# Altium PCB UWBNode_Pcb.PcbDoc
Units mm, origin at the board's own origin, x right, y up, seen from the top; angles counter-clockwise.
Board outline 30 x 46 mm, 2 copper layers (Top Layer, Bottom Layer), stack 1.66 mm thick; 45 components, 54 nets, 245 pads, 160 vias.
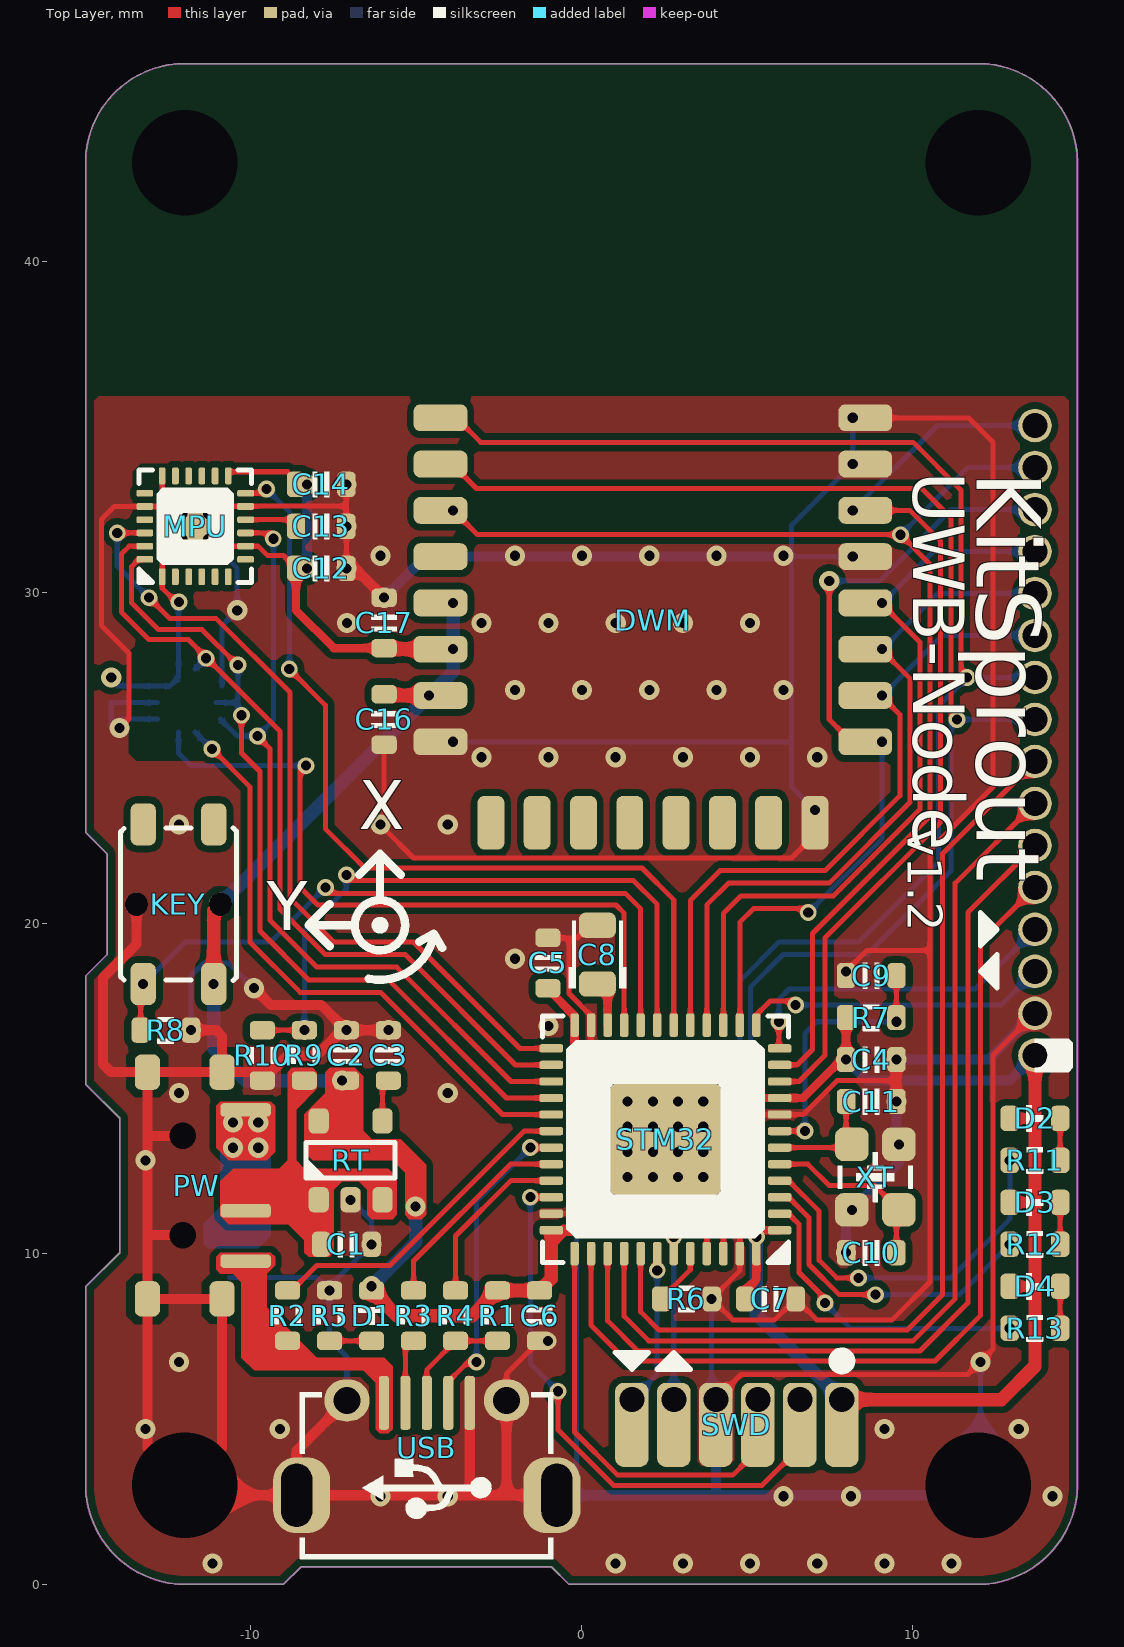
[diagram p0: Top Layer view]
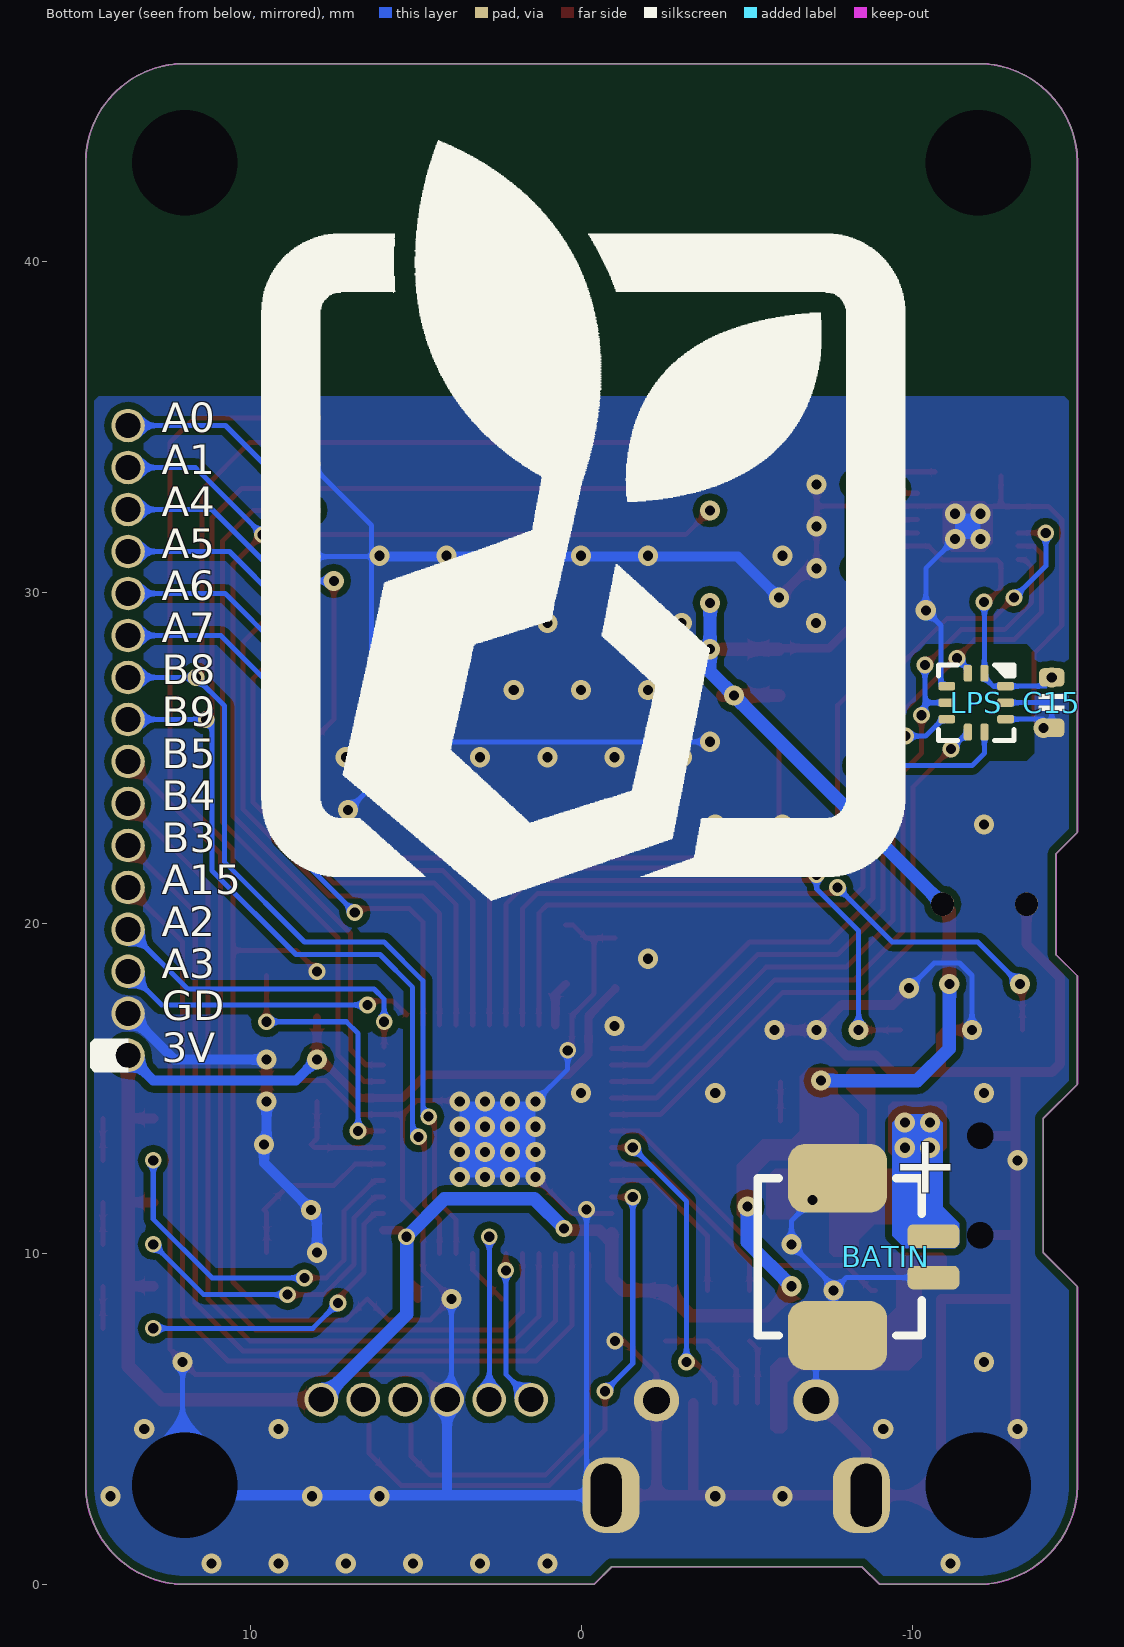
[diagram p1: Bottom Layer view, seen from below]
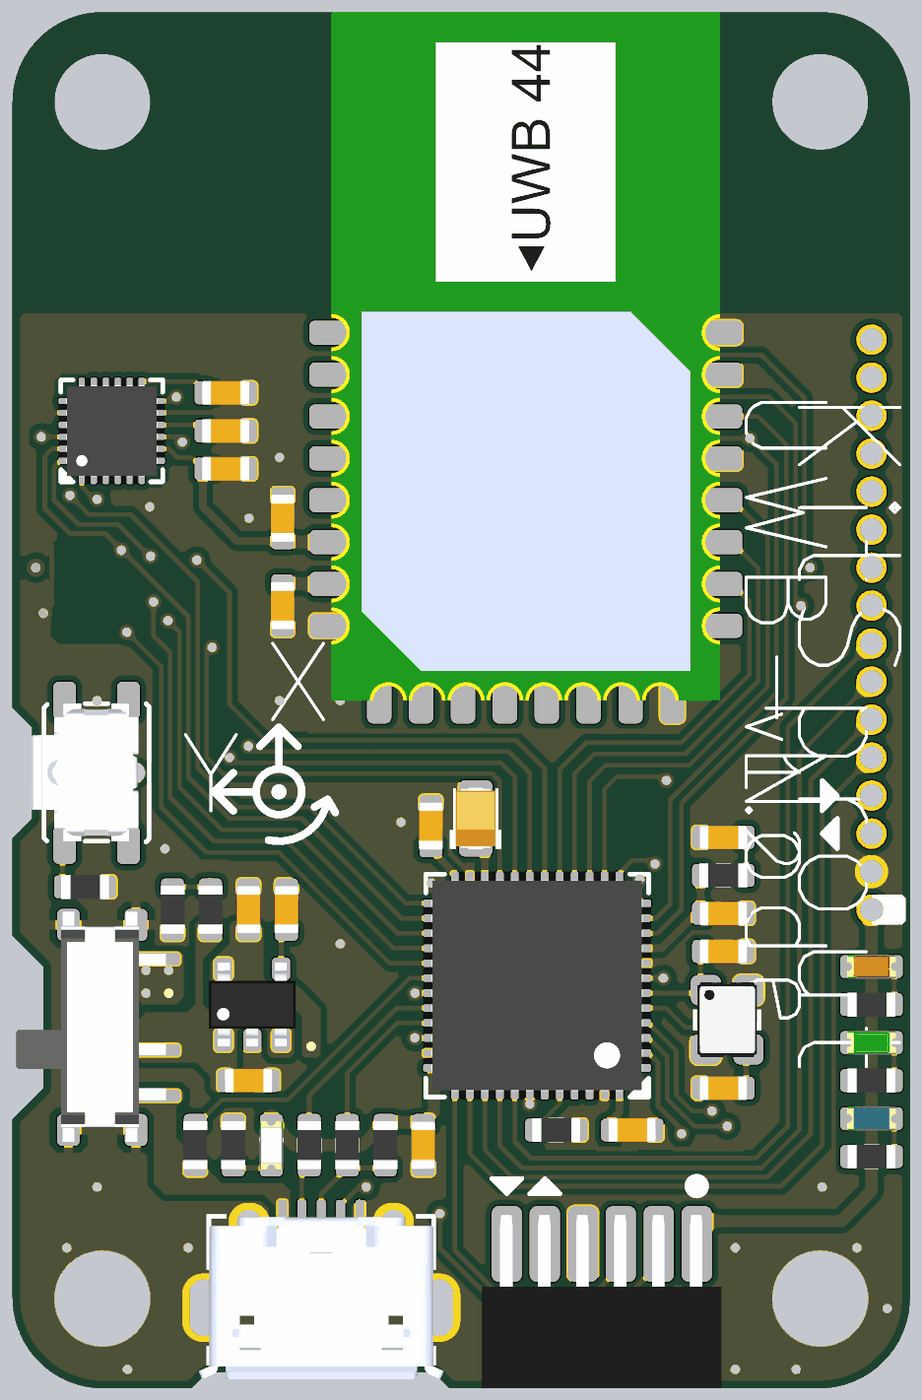
[diagram p2: 3D render of the assembled board from above, using the file's embedded part models]
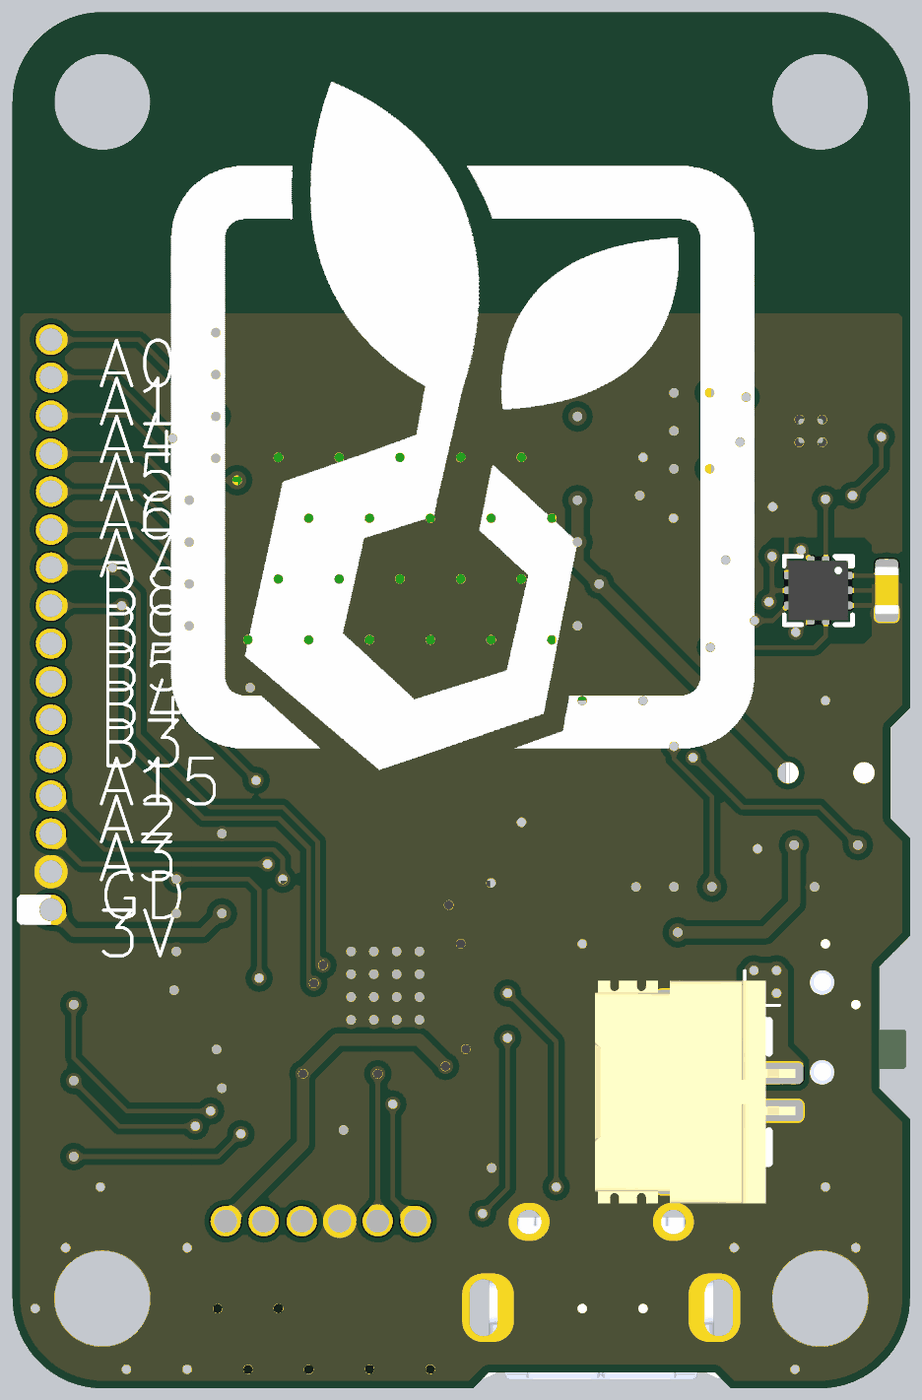
[diagram p3: 3D render of the assembled board from below, using the file's embedded part models]

## Layer stack, top to bottom
Top Solder: solder mask 0.01, Solder Resist, Dk 3.5
Top Layer: signal copper 0.03
Dielectric 1: dielectric 1.6, FR-4, Dk 4.8
Bottom Layer: signal copper 0.03
Bottom Solder: solder mask 0.01, Solder Resist, Dk 3.5

## Board outline
-15,3.033 -15,9.003 -13.97,10.033 -13.97,14.097 -15,15.127 -15,18.401 -14.351,19.05 -14.351,22.098 -15,22.747 -15,43 cw(c-12,43) -12,46 12,46 cw(c12,43) 15,43 15,3.033 cw(c11.967,3.033) 11.967,0 -0.381,0 -0.917,0.536 -8.481,0.536 -9.017,0 -11.967,0 cw(c-11.967,3.033)

## Design rules (kind name [scope] priority, off if disabled: settings)
BoardOutlineClearance [All] p1: gap=0.254 except(0: Arc-SplitContinuation Track-SplitContinuation SMDPad-SplitContinuation THPad-SplitContinuation Via-SplitContinuation Fill-SplitContinuation Poly-SplitContinuation Region-SplitContinuation Text-SplitContinuation)
Clearance ClearancePolygon [InPolygon] p1: gap=0.203
Clearance [All] p2: gap=0.152
ComponentClearance [All] p1: gap=0 collisioncheckmode=3 verticalgap=0 showdistances=FALSE
Height [All] p1: minheight=0 maxheight=127 prefheight=12.7
HoleSize [All] p1: absolutevalues=TRUE maxlimit=5.08 minlimit=0.025 maxpercent=80.000 minpercent=20.000
HoleToHoleClearance [All] p1: gap=0.152 allowstackedmicrovias=TRUE
MinimumAnnularRing [All] p1: minimumring=0.102
MinimumSolderMaskSliver [All] p1: minsoldermaskwidth=0
PolygonConnect [All] p1: connectstyle=Direct reliefconductorwidth=0.254 reliefentries=4 polygonreliefangle="90 Angle" airgapwidth=0.254
RoutingVias [All] p1: holewidth=0.305 width=0.61 viastyle="Through Hole" minholewidth=0.305 minwidth=0.508 maxholewidth=0.711 maxwidth=1.27
SilkToSilkClearance [All] p1: silktosilkclearance=0
SilkToSolderMaskClearance [IsPad] p1: minsilkscreentomaskgap=0 clearancetoexposedcopper=TRUE
SolderMaskExpansion [All] p1: expansion=0.051
Width [All] p1: maxlimit=2.54 minlimit=0.152 preferedwidth=0.254
23 further rules are at their usual default settings.

## Components (designator, comment, footprint, x,y, rotation, side; value= is the part's Value field where it differs from the comment)
BATIN "MX1.25_2P" MX1.25_S90_2P -7.747,9.906 r270 bottom
C1 "Cap_0603" CAP_0603 -7.112,10.287 r180 top
C2 "Cap_0603" CAP_0603 -7.112,16.002 r270 top
C3 "Cap_0603" CAP_0603 -5.842,16.002 r270 top
C4 "Cap_0603" CAP_0603 8.763,15.875 r0 top
C5 "Cap_0603" CAP_0603 -1.016,18.796 r90 top
C6 "Cap_0603" CAP_0603 -1.27,8.128 r270 top
C7 "Cap_0603" CAP_0603 5.715,8.636 r0 top
C8 "Cap_Tan_0805" CAP_TAN_P0805 0.483,19.05 r90 top
C9 "Cap_0603" CAP_0603 8.763,18.415 r0 top
C10 "Cap_0603" CAP_0603 8.763,10.033 r0 top
C11 "Cap_0603" CAP_0603 8.763,14.605 r180 top
C12 "Cap_0603" CAP_0603 -7.874,30.734 r180 top
C13 "Cap_0603" CAP_0603 -7.874,32.004 r180 top
C14 "Cap_0603" CAP_0603 -7.874,33.274 r180 top
C15 "Cap_0603" CAP_0603 -14.224,26.67 r270 bottom
C16 "Cap_0603" CAP_0603 -5.969,26.162 r270 top
C17 "Cap_0603" CAP_0603 -5.969,29.083 r90 top
D1 "LED_0603" LED_0603_YELLOW -6.35,8.128 r270 top
D2 "LED_0603" LED_0603_RED 13.716,14.097 r0 top
D3 "LED_0603" LED_0603_GREEN 13.716,11.557 r0 top
D4 "LED_0603" LED_0603_BLUE 13.716,9.017 r0 top
DWM "DWM1000" DWM1000 2.159,22.987 r0 top locked
KEY "ButtonTACT" ButtonTACT_3.5*3.55_90 -12.192,20.574 r90 top locked
LPS "LPS22HB" HCLGA-2x2_10 -11.938,26.67 r270 bottom
MPU "MPU925x" QFN_P0.4_24 -11.684,32.004 r90 top
PW "SwitchSPDT_2.8x6.6_90" SwitchSPDT_2.8X6.6_90 -12.065,12.065 r270 top locked
R1 "Res_0603" RES_0603 -2.54,8.128 r270 top
R2 "Res_0603" RES_0603 -8.89,8.128 r270 top
R3 "Res_0603" RES_0603 -5.08,8.128 r270 top
R4 "Res_0603" RES_0603 -3.81,8.128 r270 top
R5 "Res_0603" RES_0603 -7.62,8.128 r270 top
R6 "Res_0603" RES_0603 3.175,8.636 r180 top
R7 "Res_0603" RES_0603 8.763,17.145 r180 top
R8 "Res_0603" RES_0603 -12.573,16.764 r180 top
R9 "Res_0603" RES_0603 -8.382,16.002 r90 top
R10 "Res_0603" RES_0603 -9.652,16.002 r270 top
R11 "Res_0603" RES_0603 13.716,12.827 r180 top
R12 "Res_0603" RES_0603 13.716,10.287 r180 top
R13 "Res_0603" RES_0603 13.716,7.747 r180 top
RT "RT9193" SOT23-5 -6.985,12.827 r90 top
STM32 "STM32F4x1C" QFN_P0.5_48 2.54,13.462 r180 top locked
SWD "HDR1x6_1.27" HDR1X6_1.27_180HFD 7.874,4.826 r270 top locked
USB "USB_Micro" USB_Micro-AB -4.68,2.95 r180 top locked
XT "XTAL_2520_4P" XT_2520_4 8.89,12.319 r270 top

## Footprints (in the part's own frame and the unit in brackets; to place one, negate y for a bottom-side part, rotate by r counter-clockwise, add the part's x,y. Pads: shape width x height; smd on the part's side, far side on the other; paste and mask are expansions set on the pad)
ButtonTACT_3.5*3.55_90 [mil]
  round 27.56 hole 27.56 mask+0: 0(-0.01,-50) 0(0,50)
  rrect50% 50x30 smd: 1(-95,42) 2(-95,-42) 3(95,42) 4(95,-42)
  silkscreen extent -91,-69 91,69, body extent -90,-55 91,85, height 56
CAP_0603 [mil]
  rrect50% 22x30 smd: 1(-30,0) 2(30,0)
  silkscreen extent -10,-15 10,15, body extent -31,-16 31,16, height 31
CAP_TAN_P0805 [mil]
  rrect50% 30x44 smd: 1(-35,0) 2(35,0)
  silkscreen extent -40,-34 40,34, body extent -40,-27 40,27, height 59
DWM1000 [mil]
  rrect50% 64x32 smd: 1(-253,484.25) 2(-253,429.13) 3(-253,374.02) 4(-253,318.9) 5(-253,263.78) 6(-253,208.66) 7(-253,153.54) 8(-253,98.43) 17(253,98.43) 18(253,153.54) 19(253,208.66) 20(253,263.78) 21(253,318.9) 22(253,374.02) 23(253,429.13) 24(253,484.25)
  rrect50% 32x64 smd: 9(-192.91,2) 10(-137.8,2) 11(-82.68,2) 12(-27.56,2) 13(27.56,2) 14(82.68,2) 15(137.8,2) 16(192.91,2)
  body extent -256,0 256,906, height 114
HCLGA-2x2_10 [mil]
  rrect50% 20x10 smd: 1(-35,9.84) 2(-35,-9.84) 6(35,-9.84) 7(35,9.84)
  rrect50% 10x20 smd: 3(-19.68,-35) 4(0,-35) 5(19.69,-35) 8(19.69,35) 9(0,35) 10(-19.68,35)
  silkscreen extent -45,-45 45,45, body extent -39,-39 39,39, height 31
HDR1X6_1.27_180HFD [mil]
  rrect50% 100x40 smd: 1(0,0) 2(0,-50) 3(0,-100) 4(0,-150) 5(0,-200) 6(0,-250)
  body extent -38,-283 190,33, height 71
LED_0603_BLUE [mil]
  rrect50% 22x30 smd: 1(-30,0) 2(30,0)
  silkscreen extent -10,-16 10,16, body extent -32,-16 32,16, height 24
LED_0603_GREEN [mil]
  rrect50% 22x30 smd: 1(-30,0) 2(30,0)
  silkscreen extent -10,-16 10,16, body extent -32,-16 32,16, height 24
LED_0603_RED [mil]
  rrect50% 22x30 smd: 1(-30,0) 2(30,0)
  silkscreen extent -10,-16 10,16, body extent -32,-16 32,16, height 24
LED_0603_YELLOW [mil]
  rrect50% 22x30 smd: 1(-30,0) 2(30,0)
  silkscreen extent -10,-16 10,16, body extent -32,-16 32,16, height 24
MX1.25_S90_2P [mil]
  rrect50% 82x118 smd: 0(-93.58,0) 0(93.58,0)
  rrect50% 28x62 smd: 1(-24.61,114) 2(24.61,114)
  silkscreen extent -94,-95 94,100, body extent -147,-129 147,135, height 98
QFN_P0.4_24 [mil]
  rrect50% 20x8 smd: 1(-60,39.37) 2(-60,23.62) 3(-60,7.87) 4(-60,-7.87) 5(-60,-23.62) 6(-60,-39.37) 13(60,-39.37) 14(60,-23.62) 15(60,-7.87) 16(60,7.87) 17(60,23.62) 18(60,39.37)
  rrect50% 8x20 smd: 7(-39.37,-60) 8(-23.62,-60) 9(-7.87,-60) 10(7.87,-60) 11(23.62,-60) 12(39.37,-60) 19(39.37,60) 20(23.62,60) 21(7.87,60) 22(-7.87,60) 23(-23.62,60) 24(-39.37,60)
  rrect20% 32x32 smd: 25(0,0)
  silkscreen extent -67,-67 67,67, body extent -60,-60 60,60, height 39
QFN_P0.5_48 [mil]
  rrect50% 28x10 smd: 1(-136,108.27) 2(-136,88.58) 3(-136,68.9) 4(-136,49.21) 5(-136,29.53) 6(-136,9.84) 7(-136,-9.84) 8(-136,-29.53) 9(-136,-49.21) 10(-136,-68.9) 11(-136,-88.58) 12(-136,-108.27) 25(136,-108.27) 26(136,-88.58) 27(136,-68.9) 28(136,-49.21) 29(136,-29.53) 30(136,-9.84) 31(136,9.84) 32(136,29.53) 33(136,49.21) 34(136,68.9) 35(136,88.58) 36(136,108.27)
  rrect50% 10x28 smd: 13(-108.27,-136) 14(-88.58,-136) 15(-68.9,-136) 16(-49.21,-136) 17(-29.53,-136) 18(-9.84,-136) 19(9.84,-136) 20(29.53,-136) 21(49.21,-136) 22(68.9,-136) 23(88.58,-136) 24(108.27,-136) 37(108.27,136) 38(88.58,136) 39(68.9,136) 40(49.21,136) 41(29.53,136) 42(9.84,136) 43(-9.84,136) 44(-29.53,136) 45(-49.21,136) 46(-68.9,136) 47(-88.58,136) 48(-108.27,136)
  rrect10% 132x132 smd: 49(0,0)
  silkscreen extent -147,-147 147,147, body extent -139,-139 139,139, height 22
RES_0603 [mil]
  rrect50% 22x30 smd: 1(-30,0) 2(30,0)
  silkscreen extent -10,-16 10,16, body extent -31,-16 31,16, height 18
SOT23-5 [mil]
  rrect50% 30x24 smd: 1(-47,38) 2(-47,0) 3(-47,-38) 4(47,-38) 5(47,38)
  silkscreen extent -21,-53 21,53, body extent -55,-57 55,57, height 57
SwitchSPDT_2.8X6.6_90 [mil]
  rrect50% 42x30 smd: 0(-135,-42) 0(-135,47) 0(135,-42) 0(135,47)
  round 10 hole 31.5: 0(-59.06,0) 0(59.06,0)
  rrect50% 16x60 smd: 1(90,75) 2(30,75) 3(-90,75)
  body extent -152,-111 151,86, height 55
USB_Micro-AB [mil]
  rrect80% 68x90 hole 37 slot 75 at 90 deg copper offset 6,0 mask+0: 0(-155,10)
  oval 54x50 hole 32 mask+0: 0(-95,-103) 0(95,-103)
  rrect80% 68x90 hole 37 slot 75 at 90 deg copper offset -6,0 mask+0: 0(155,10)
  rrect50% 12x64 smd: 1(51.18,-100) 2(25.59,-100) 3(0,-100) 4(-25.59,-100) 5(-51.18,-100)
  silkscreen extent -150,-113 150,86, body extent -161,-109 161,104, height 108
XT_2520_4 [mil]
  rrect50% 40x40 smd: 1(39,28) 2(-39,28) 3(-39,-28) 4(39,-28)
  silkscreen extent -30,-44 30,44, body extent -49,-39 49,39, height 31

## Part data
BATIN: "MX"
C1 C2 C3 C4 C5 C6 C7 C8 C9 C10 C11 C12 C13 C14 C15 C16 C17: "Capacitor"
D1 D2 D3 D4: "LED"
DWM: "Module"
KEY: "Button"
LPS: "Sensor Pressure"
MPU: "Sensor Motion"
PW: "Switch"
R1 R2 R3 R4 R5 R6 R7 R8 R9 R10 R11 R12 R13: "Resistor"
RT: "Power"
STM32: "MCU"
SWD: "Header"
USB: "USB"
XT: "Crystal Oscillator"

## Free pads (board coordinates)
  round 2.9 hole 3.2 unplated paste+0 mask+0: 0(-12,43) 0(12,43)
  round 2.9 hole 3.2 paste+0 mask+0: 0(-12,3) 0(12,3)
  round 1.016 hole 0.762: 0(13.716,16.002) 0(13.716,17.272) 0(13.716,18.542) 0(13.716,19.812) 0(13.716,21.082) 0(13.716,22.352) 0(13.716,23.622) 0(13.716,24.892) 0(13.716,26.162) 0(13.716,27.432) 0(13.716,28.702) 0(13.716,29.972) 0(13.716,31.242) 0(13.716,32.512) 0(13.716,33.782) 0(13.716,35.052) 2(1.524,5.588) 2(2.794,5.588) 2(4.064,5.588) 2(5.334,5.588) 2(6.604,5.588) 2(7.874,5.588)

## Via types
v1: diameter 0.61, hole 0.305, Top Layer to Bottom Layer, tented both sides, 118 vias
v2: diameter 0.508, hole 0.305, Top Layer to Bottom Layer, tented both sides, 42 vias

## Nets (pads, with @x,y where several pads share a name; then routed paths per layer and width w, separated by ;. In a path a pad name is that pad's centre, name@x,y a point inside that pad or via, vN(x,y) a via of type N, cw(c..) or ccw(c..) an arc to the next point about the centre after c; other vN are vias at no path point)
3V3: C2.2 C4.1 C5.1 C6.1 C7.1 C12.2 C14.2 C15.1 C16.1 C17.1 D1.1 D2.1 D3.1 D4.1 DWM.5 DWM.6 DWM.7 KEY.0@-10.922,20.574 KEY.2 LPS.1 LPS.10 MPU.1 MPU.8 MPU.13 pad.0@13.716,16.002 pad.2@7.874,5.588 R1.1 R7.2 RT.5 STM32.1 STM32.9 STM32.24 STM32.36 STM32.48 SWD.1 | length 107.5
  Top Layer w0.152: v2(-12.176,29.718) -12.272,29.718 -12.684,30.13 MPU.1 -12.684,30.877 -12.573,30.988 -10.922,30.988 -10.506,31.404 MPU.8 -9.781,31.404 -9.492,31.115 -9.017,31.115 C12.2 ; MPU.13@-10.684,33.655 -8.89,33.655 C14.2@-8.572,33.337
  Top Layer w0.254: C12.2 -8.636,29.464 -7.493,28.321 C17.1 ; C5.1 -1.016,18.005 -0.21,17.199 STM32.24 -0.21,16.027 0.399,15.418 4.707,15.418 5.413,14.712 STM32.9 6.703,14.712 6.85,14.859 7.866,15.875 v1(8.001,15.875) R7.2 ; C7.1 4.953,8.89 5.29,9.227 STM32.48 ; v2(5.29,10.516) 5.486,10.712 STM32.1
  Top Layer w0.305: D4.1 13.716,9.017 ; D3.1 13.716,11.557 ; D2.1 13.716,14.097
  Top Layer w0.356: -0.914,10.338 -0.54,10.712 v2@0.425,10.712
  Top Layer w0.406: v1(-11.125,18.161) -11.125,20.371 KEY.0@-10.922,20.574 ; D1.1 -5.588,8.128 -3.302,8.128 R1.1 C6.1 -0.914,9.246 -0.914,10.338 STM32.36@-0.914,10.61 ; C16.1@-5.969,26.887 v1(-4.609,26.887) DWM.7 ; C17.1@-5.963,28.287 DWM.6 ; SWD.1@7.62,5.842 SWD.1@7.696,5.842 ; SWD.1@7.745,5.565 SWD.1@7.696,5.842 ; pad.0@13.716,16.002 13.716,14.097 13.716,11.557 13.716,9.017 13.716,6.604 12.7,5.588 7.95,5.588 SWD.1@7.696,5.842
  Bottom Layer w0.152: v1(-14.224,27.432) -13.962,27.17 LPS.10 -12.454,27.17 -12.188,27.436 LPS.1 v2@-12.188,29.706
  Bottom Layer w0.305: v1(-8.306,30.734) v1(-8.306,33.274) ; v1(8.001,15.875) 8.636,15.24 12.954,15.24 pad.0@13.716,16.002
  Bottom Layer w0.406: v1(-11.125,18.161) -11.125,16.205 -10.16,15.24 v1(-7.239,15.24) ; KEY.0@-10.922,20.574 v1(-4.609,26.887) -3.886,27.61 v1(-3.886,28.287) v1(-3.886,29.687) ; v1(-6.35,9.017) -5.017,10.35 v1(-5.017,11.43) ; v2(0.527,10.763) 1.422,11.659 4.147,11.659 v2(5.29,10.516) 5.29,8.172 pad.2@7.874,5.588
ADC: R9.2 R10.1 STM32.19 | length 19.8
  Top Layer w0.152: R10.1 v1(-8.382,16.764) ; v2@-7.112,21.285 1.575,21.285 2.29,20.57 STM32.19
  Bottom Layer w0.152: v1(-8.382,16.764) -8.382,19.765 -7.112,21.035 v2(-7.112,21.463)
BOOT: R6.2 STM32.44 | length 1.7
  Top Layer w0.152: R6.2 3.29,9.513 STM32.44
D_CSD: DWM.17 pad.0@13.716,32.512 STM32.14 | length 24.1
  Top Layer w0.152: STM32.14 4.79,20.03 5.207,20.447 v2@6.858,20.447 ; v1(7.493,30.353) 7.493,26.162 8.168,25.487 DWM.17
  Bottom Layer w0.152: v2(6.858,20.32) 9.093,22.555 v1(9.093,25.487) ; v1(7.493,30.353) 9.017,30.353 11.176,32.512 pad.0@13.716,32.512
D_EXT: DWM.1 pad.0@13.716,27.432 STM32.45 | length 46.3
  Top Layer w0.152: DWM.1 -3.791,35.287 -3.048,34.544 10.033,34.544 11.481,33.096 v2@11.481,27.432 ; STM32.45 3.79,11.029 4.445,11.684 v2@4.445,14.148
  Bottom Layer w0.152: v2@4.801,14.148 4.801,18.263 5.969,19.431 8.382,19.431 10.795,21.844 10.795,26.568 v2(11.659,27.432) pad.0@13.716,27.432
  other v2: 4.623,14.148
D_IRQ: DWM.22 pad.0@13.716,35.052 STM32.10 | length 28.3
  Top Layer w0.152: STM32.10 6.576,15.212 7.366,16.002 7.366,19.558 10.864,23.056 10.864,31.554 9.931,32.487 DWM.22 v1(8.204,32.487)
  Bottom Layer w0.152: v1(8.204,32.487) 10.769,35.052 pad.0@13.716,35.052
D_PHA: DWM.9
D_POL: DWM.10
D_RST: DWM.3 pad.0@13.716,33.782 STM32.11 | length 37.3
  Top Layer w0.152: v1(-3.886,32.487) -3.149,31.75 v2(9.652,31.75) 10.541,30.861 10.541,23.241 6.985,19.685 6.985,16.179 6.518,15.712 STM32.11
  Bottom Layer w0.152: v2(9.652,31.75) 11.684,33.782 pad.0@13.716,33.782
D_SCK: DWM.20 pad.0@13.716,31.242 STM32.15 | length 23.5
  Top Layer w0.152: STM32.15 4.29,20.292 4.826,20.828 7.62,20.828 10.236,23.444 10.236,28.499 9.048,29.687 DWM.20 DWM.20@8.204,29.687
  Bottom Layer w0.152: v1(9.093,29.687) 10.648,31.242 pad.0@13.716,31.242
D_SDI: DWM.18 pad.0@13.716,28.702 STM32.17 | length 20.9
  Top Layer w0.152: STM32.17 3.29,20.689 4.191,21.59 7.366,21.59 9.627,23.851 9.627,26.314 9.054,26.887 DWM.18 DWM.18@8.204,26.887
  Bottom Layer w0.152: v1(9.093,26.887) 10.908,28.702 pad.0@13.716,28.702
D_SDO: DWM.19 pad.0@13.716,29.972 STM32.16 | length 22.2
  Top Layer w0.152: STM32.16 3.79,20.554 4.445,21.209 7.493,21.209 9.931,23.647 9.931,27.407 9.051,28.287 DWM.19 DWM.19@8.204,28.287
  Bottom Layer w0.152: v1(9.093,28.287) 10.778,29.972 pad.0@13.716,29.972
D_WAK: DWM.2 pad.0@13.716,26.162 STM32.46 | length 44.9
  Top Layer w0.152: DWM.2 -3.915,33.887 -3.175,33.147 10.287,33.147 11.176,32.258 v2@11.176,26.162 ; STM32.46 4.29,11.021 4.75,11.481 v2@4.75,13.538
  Bottom Layer w0.152: v2@5.105,13.538 5.105,18.059 6.096,19.05 8.636,19.05 11.176,21.59 v2@11.176,26.162 ; v2(11.354,26.162) pad.0@13.716,26.162
  other v2: 4.928,13.538
GND: BATIN.0 BATIN.2 C1.1 C2.1 C3.1 C4.2 C5.2 C6.2 C7.2 C8.2 C9.1 C10.1 C11.1 C12.1 C13.1 C14.1 C15.2 C16.2 C17.2 DWM.8 DWM.16 DWM.21 DWM.23 DWM.24 KEY.0@-13.462,20.574 LPS.3 LPS.8 LPS.9 MPU.11 MPU.18 MPU.20 MPU.25 pad.0@12,3 pad.0@13.716,17.272 pad.0@-12,3 pad.2@4.064,5.588 PW.0 R5.1 R6.1 R8.1 R10.2 RT.2 STM32.8 STM32.23 STM32.35 STM32.47 STM32.49 SWD.4 USB.0 USB.5 XT.2 XT.4 | length 291.4
  Top Layer w0.152: v1(-13.97,25.908) -13.691,26.187 -13.691,28.169 -14.526,29.004 -14.526,32.21 -14.132,32.604 MPU.20 -12.684,32.604 ; MPU.18 -12.684,32.604 ; MPU.25 v1(-12.065,32.385) -12.284,32.604 -12.684,32.604 ; v1(-11.303,32.385) -11.074,32.614 MPU.11@-10.16,32.614 ; MPU.11 MPU.11@-10.16,32.614 ; v1(-7.112,30.734) v1(-7.112,32.004) -7.112,32.614 ; v1(-7.112,33.274) -7.112,32.614 ; C16.2 -5.969,22.86 -5.08,21.971 6.35,21.971 7.059,22.68 DWM.16 ; USB.0@-2.267,5.566 -2.267,6.369 C6.2 ; C5.2 -0.381,19.558 ; STM32.35 0.29,11.212 v1(1.397,12.319) v1(2.159,13.081) STM32.49 ; v2(0.417,16.154) 0.29,16.281 STM32.23 0.29,17.202 -0.381,17.873 -0.381,19.558 ; C8.2 0.254,19.939 -0.127,19.558 -0.381,19.558 ; STM32.49@3.683,14.63 4.992,14.63 5.41,14.212 ; SWD.4 4.064,5.588 4.826,6.35 11.684,6.35 v1(12.065,6.731) 12.446,7.112 12.446,16.002 pad.0@13.716,17.272 ; v2(8.001,18.542) 8.636,19.177 10.541,19.177 ; v1(8.204,35.287) DWM.24 11.703,35.287 12.446,34.544 12.446,24.13 10.541,22.225 10.541,19.177 ; 9.525,15.24 7.734,15.24 6.706,14.212 STM32.8 5.41,14.212 ; MPU.11@-10.16,32.614 -7.112,32.614 ; 5.41,14.212 5.41,11.633 4.79,11.013 STM32.47 4.79,9.489 v1(3.937,8.636) 4.572,8.001 5.842,8.001 C7.2 7.112,8.001 9.398,8.001 10.541,9.144 10.541,19.177
  Top Layer w0.305: KEY.0@-13.462,20.574 -13.462,19.364 -14.478,18.348 -14.478,15.748 -14.224,15.494 PW.0@-13.132,15.494 ; PW.0@-12.065,10.565 -13.132,10.565 ; PW.0@-12.065,13.565 -13.132,13.565 ; v1(-11.811,16.764) -11.049,16.764 -10.871,16.586 PW.0@-10.871,15.494 ; v1(-9.906,18.034) -9.398,17.526 -7.874,17.526 v1(-7.112,16.764) v1(-5.842,16.764) ; C2.1@-7.239,16.764 -8.001,16.002 -8.89,16.002 -9.398,15.494 PW.0@-10.871,15.494 ; v1(-7.112,30.734) -6.858,30.734 v1(-5.969,29.845) ; USB.0@-7.093,5.566 -8.617,4.042 USB.0@-8.617,2.696 ; USB.5 -3.38,2.696 ; USB.0@-2.267,5.566 -2.267,2.696 ; USB.0@-0.743,2.696 -2.267,2.696 ; v1(9.525,14.605) 9.525,15.24 v1(9.525,15.875) ; PW.0@-13.132,8.636 -13.132,10.565 ; PW.0@-13.132,8.636 -10.871,8.636 -10.871,4.129 pad.0@-12,3 ; PW.0@-13.132,8.636 -13.132,4.132 pad.0@-12,3 ; -13.132,10.565 -13.132,13.565 ; -13.132,13.565 PW.0@-13.132,15.494 ; PW.0@-13.132,15.494 PW.0@-10.871,15.494 ; pad.0@-12,3 -11.696,2.696 USB.0@-8.617,2.696 ; USB.0@-8.617,2.696 -3.38,2.696 ; -3.38,2.696 -2.267,2.696
  Bottom Layer w0.152: LPS.8 -13.962,26.17 C15.2 -14.224,26.67 LPS.9 ; v1(-11.811,16.764) -11.811,18.415 -11.43,18.796 -10.668,18.796 v1(-9.906,18.034) ; v1(-11.303,31.623) -10.414,30.734 v1(-10.414,29.464) -10.871,29.007 LPS.3@-10.871,27.17 ; BATIN.2 -8.011,9.281 v1(-7.62,8.89) ; USB.0@-7.093,5.566 -7.093,6.875 -7.747,7.529 -7.62,7.656 v1(-7.62,8.89) ; v1(-6.985,11.633) -6.35,10.998 v1(-6.35,10.287) -7.62,9.017 v1(-7.62,8.89) ; v1(-3.886,25.487) 6.35,25.487 ; USB.0@-0.743,2.696 -0.152,3.287 v2(-0.152,11.339) ; v2(0.417,16.154) 0.417,15.585 v1(1.397,14.605) ; v1(3.937,8.636) 3.937,5.715 pad.2@4.064,5.588 ; v1(7.059,23.419) 6.35,24.128 6.35,25.487 ; v1(8.204,31.087) v1@6.35,31.087 ; v1(8.204,35.287) v1(8.204,33.887) 6.35,32.033 v1@6.35,31.087 ; pad.0@12.065,3 v1(12.065,6.731) ; 6.35,25.487 v1@6.35,31.087
  Bottom Layer w0.305: v1(-5.969,29.845) -4.727,31.087 0.018,31.087 v1@6.35,31.087 ; USB.0@-0.743,2.696 4.064,2.696 ; pad.2@4.064,5.588 4.064,2.696 ; v1(8.001,10.033) 8.001,11.151 v1(8.179,11.328) 9.601,12.751 v1(9.601,13.31) 9.525,13.386 v1(9.525,14.605) ; v1(9.525,15.875) 12.319,15.875 pad.0@13.716,17.272 ; pad.0@11.696,2.696 4.064,2.696
  other v1: -11.158,0.635 1.034,0.635 3.066,0.635 5.098,0.635 7.13,0.635 9.162,0.635 11.194,0.635 -6.078,2.667 -4.046,2.667 6.114,2.667 8.146,2.667 14.242,2.667 -13.19,4.699 -9.126,4.699 9.162,4.699 13.226,4.699 -12.174,6.731 2.159,12.319 2.921,12.319 3.683,12.319 -13.19,12.827 1.397,13.081 2.921,13.081 3.683,13.081 1.397,13.843 2.159,13.843 2.921,13.843 3.683,13.843 2.159,14.605 2.921,14.605 3.683,14.605 -12.174,14.859 -4.046,14.859 0.018,14.859 -0.998,16.891 -2.014,18.923 -12.174,22.987 -6.078,22.987 -4.046,22.987 -3.03,25.019 -0.998,25.019 1.034,25.019 3.066,25.019 5.098,25.019 7.13,25.019 -2.014,27.051 0.018,27.051 2.05,27.051 4.082,27.051 6.114,27.051 -7.094,29.083 -3.03,29.083 -0.998,29.083 1.034,29.083 3.066,29.083 5.098,29.083 -6.078,31.115 -2.014,31.115 0.018,31.115 2.05,31.115 4.082,31.115 6.114,31.115 -12.065,31.623
  other v2: -1.016,7.366
KEY: KEY.1 R8.2 STM32.20 | length 21.4
  Top Layer w0.152: R8.2 KEY.1@-13.335,18.161 ; v2@-7.747,20.904 1.321,20.904 1.79,20.435 STM32.20
  Bottom Layer w0.152: v1(-13.259,18.161) -11.989,19.431 -9.398,19.431 v2(-7.747,21.082)
LED_B: R13.2 STM32.2 | length 9.3
  Top Layer w0.152: STM32.2 6.263,11.212 6.579,10.896 6.579,9.436 7.366,8.649 v2(7.366,8.509)
  Bottom Layer w0.152: v2(7.366,8.509) 8.128,7.747 v2(12.954,7.747)
LED_G: R12.2 STM32.3 | length 9.6
  Top Layer w0.152: STM32.3 6.263,11.712 6.883,11.092 6.883,9.677 7.797,8.763 v2(8.89,8.763)
  Bottom Layer w0.152: v2(8.89,8.763) 11.43,8.763 v2(12.954,10.287)
LED_R: R11.2 STM32.4 | length 11.6
  Top Layer w0.152: STM32.4 6.263,12.212 7.188,11.287 7.188,9.803 7.72,9.271 v2(8.382,9.271)
  Bottom Layer w0.152: v2(8.382,9.271) 11.176,9.271 12.954,11.049 v2(12.954,12.827)
M_CSB: LPS.6 STM32.29 | length 18.3
  Top Layer w0.152: v2(-11.18,25.273) -10.033,24.126 -10.033,19.431 -8.509,17.907 -6.083,17.907 -2.388,14.212 STM32.29
  Bottom Layer w0.152: LPS.6 v2(-11.18,25.273)
M_CSM: MPU.22 STM32.25 | length 24.7
  Top Layer w0.152: v2(-14.043,31.804) MPU.22 ; v2(-13.081,29.845) -12.446,29.21 -11.049,29.21 -8.814,26.975 -8.814,20.752 -7.493,19.431 -5.08,19.431 -1.861,16.212 STM32.25
  Bottom Layer w0.152: v2(-14.043,31.804) -14.043,30.807 v2(-13.081,29.845)
M_INTB: LPS.7 STM32.21 | length 21.8
  Top Layer w0.152: v2@-8.509,24.765 -8.509,21.082 -7.976,20.549 1.041,20.549 1.29,20.3 STM32.21
  Bottom Layer w0.152: LPS.7 -12.188,25.142 -11.811,24.765 v2(-8.331,24.765)
M_INTM: MPU.12 STM32.18 | length 26.9
  Top Layer w0.152: MPU.12 -9.652,33.004 v2(-9.525,33.131) ; v2(-8.839,27.686) -7.747,26.594 -7.747,22.86 -6.553,21.666 1.829,21.666 2.79,20.705 STM32.18
  Bottom Layer w0.152: v2(-9.525,33.131) -8.839,32.445 v2(-8.839,27.686)
M_SCK: LPS.2 MPU.23 STM32.26 | length 24.9
  Top Layer w0.152: MPU.23 -13.681,31.404 -13.919,31.166 -13.919,29.413 -13.081,28.575 -11.891,28.575 -9.119,25.803 -9.119,20.422 -7.747,19.05 -5.334,19.05 -1.996,15.712 STM32.26
  Bottom Layer w0.152: LPS.2@-11.684,27.686 v2(-11.359,28.014)
M_SDI: LPS.4 MPU.24 STM32.28 | length 25.4
  Top Layer w0.152: MPU.24 -13.395,31.004 -13.614,30.785 -13.614,29.696 -12.798,28.88 -11.481,28.88 v2@-10.414,27.813 ; v2(-10.287,26.289) -10.287,25.146 -9.728,24.587 -9.728,19.761 -8.255,18.288 -5.842,18.288 -2.266,14.712 STM32.28
  Bottom Layer w0.152: LPS.4 -10.389,26.67 ; v2@-10.389,26.289 -10.389,26.67 ; v2(-10.389,27.813) -10.389,26.67
M_SDO: LPS.5 MPU.9 STM32.27 | length 24.6
  Top Layer w0.152: MPU.9 v2@-9.338,31.804 ; v2(-9.804,25.659) -9.423,25.278 -9.423,20.091 -8.001,18.669 -5.588,18.669 -2.131,15.212 STM32.27
  Bottom Layer w0.152: LPS.5@-10.922,26.17 -10.411,25.659 v2(-9.804,25.659) -9.322,26.142 v2(-9.322,31.627)
NetC3_2: C3.2 RT.4 | length 1.2
  Top Layer w0.152: RT.4 C3.2@-6.02,15.189
NetD1_2: D1.2 R5.2 | length 1.3
  Top Layer w0.152: R5.2 D1.2
NetD2_2: D2.2 R11.1 | length 1.3
  Top Layer w0.152: R11.1 D2.2
NetD3_2: D3.2 R12.1 | length 1.3
  Top Layer w0.152: R12.1 D3.2
NetD4_2: D4.2 R13.1 | length 1.3
  Top Layer w0.152: R13.1 D4.2
NetR1_2: R1.2 R4.2 USB.3 | length 3.5
  Top Layer w0.152: USB.3 -4.68,6.496 R4.2 R1.2
NetR3_2: R3.2 USB.2 | length 2
  Top Layer w0.152: USB.2 -5.33,7.116 R3.2
PA2: pad.0@13.716,19.812 STM32.12 | length 10.1
  Top Layer w0.152: STM32.12@5.969,16.256 v2(5.969,17.018)
  Bottom Layer w0.152: v2(5.969,17.018) 5.969,17.7 6.277,18.009 11.913,18.009 pad.0@13.716,19.812
PA3: pad.0@13.716,18.542 STM32.13 | length 9
  Top Layer w0.152: STM32.13@5.29,17.228 5.715,17.653 v2@6.477,17.653
  Bottom Layer w0.152: v2(6.477,17.526) 12.7,17.526 pad.0@13.716,18.542
PA15: pad.0@13.716,21.082 STM32.38 | length 28.6
  Top Layer w0.152: STM32.38 0.29,7.838 1.372,6.756 10.693,6.756 12.065,8.128 12.065,19.431 pad.0@13.716,21.082
PB3: pad.0@13.716,22.352 STM32.39 | length 28.6
  Top Layer w0.152: STM32.39 0.79,7.973 1.702,7.061 10.236,7.061 11.684,8.509 11.684,20.32 pad.0@13.716,22.352
PB4: pad.0@13.716,23.622 STM32.40 | length 28.7
  Top Layer w0.152: STM32.40 1.29,8.108 2.032,7.366 10.033,7.366 11.303,8.636 11.303,21.209 pad.0@13.716,23.622
PB5: pad.0@13.716,24.892 STM32.41 | length 28.9
  Top Layer w0.152: STM32.41 1.79,8.243 2.337,7.696 9.855,7.696 10.922,8.763 10.922,22.098 pad.0@13.716,24.892
REG: C13.2 MPU.10 | length 1.6
  Top Layer w0.152: MPU.10 -8.836,32.204 C13.2
RST: C9.2 R7.1 STM32.7 | length 7.9
  Top Layer w0.152: STM32.7 v2(6.756,13.712) ; R7.1 C9.2
  Bottom Layer w0.152: v2(6.756,13.712) 6.756,16.662 7.112,17.018 v2(9.525,17.018)
SWCLK: pad.2@5.334,5.588 STM32.37 SWD.3 | length 12.5
  Top Layer w0.152: STM32.37 -0.21,4.607 1.096,3.302 4.572,3.302 5.156,3.886 SWD.3@5.156,4.826
SWDIO: pad.2@6.604,5.588 STM32.34 SWD.2 | length 17.1
  Top Layer w0.152: v2(-1.549,11.712) STM32.34 ; v2(-0.711,5.842) -0.711,4.678 0.969,2.997 5.458,2.997 6.426,3.966 SWD.2@6.426,4.826
  Bottom Layer w0.152: v2(-1.549,11.712) -1.549,6.68 v2(-0.711,5.842)
U_RX: pad.2@2.794,5.588 STM32.43 SWD.5 | length 5.4
  Top Layer w0.152: STM32.43 v2(2.79,10.516)
  Bottom Layer w0.152: v2(2.79,10.516) 2.79,5.592 pad.2@2.794,5.588
U_TX: pad.2@1.524,5.588 STM32.42 SWD.6 | length 4.7
  Top Layer w0.152: v2(2.29,9.5) STM32.42
  Bottom Layer w0.152: pad.2@1.524,5.588 2.29,6.354 v2(2.29,9.5)
USB_DM: R3.1 STM32.32 | length 6.3
  Top Layer w0.152: R3.1 -5.08,9.779 -2.147,12.712 STM32.32
USB_DP: R4.1 STM32.33 | length 5.2
  Top Layer w0.152: R4.1 -3.81,10.541 -2.139,12.212 STM32.33
USB_ID: STM32.31 USB.4 | length 9.5
  Top Layer w0.152: USB.4 -4.03,6.13 v2@-3.302,6.858 ; v2(-1.549,13.212) STM32.31
  Bottom Layer w0.152: v2(-3.175,6.731) -3.175,11.586 v2(-1.549,13.212)
USB_VB: R2.1 STM32.30 | length 10
  Top Layer w0.152: R2.1 -8.763,8.89 -8.001,9.652 -5.792,9.652 -1.732,13.712 STM32.30
VBAT: BATIN.1 PW.3 | length 1.4
  Bottom Layer w0.457: v1@-10.541,13.843 -9.779,13.843 v1(-9.779,13.208)
  other v1: -10.541,13.208 -10.541,13.97 -9.779,13.97
VCAP: C8.1 STM32.22 | length 1.4
  Top Layer w0.254: C8.1 0.79,17.854 STM32.22
VIN: C1.2 PW.2 R9.1 RT.1 RT.3
VUSB: PW.1 R2.2 USB.1
XT_I: C10.2 STM32.5 XT.1 | length 5.5
  Top Layer w0.152: STM32.5 6.846,12.712 7.493,12.065 8.865,12.065 XT.1 9.525,11.252 C10.2
XT_O: C11.2 STM32.6 XT.3 | length 3.6
  Top Layer w0.152: STM32.6 8.081,13.212 XT.3 8.001,13.487 C11.2
pads on no net: DWM.4 DWM.11 DWM.12 DWM.13 DWM.14 DWM.15 KEY.3 KEY.4 MPU.2 MPU.3 MPU.4 MPU.5 MPU.6 MPU.7 MPU.14 MPU.15 MPU.16 MPU.17 MPU.19 MPU.21

## Polygon pours and split planes (outlines as drawn)
GND on Top Layer "GND_L01_P001" (solid, remove dead copper, pour order 1): -15,3.033 -15,9.003 -13.97,10.033 -13.97,14.097 -15,15.127 -15,18.401 -14.351,19.05 -14.351,22.098 -15,22.747 -15,43 cw(c-12,43) -12,46 12,46 cw(c12,43) 15,43 15,3.033 cw(c11.967,3.033) 11.967,0 -0.381,0 -0.917,0.536 -8.481,0.536 -9.017,0 -11.967,0 cw(c-11.967,3.033)
GND on Bottom Layer "GND_L02_P000" (solid, remove dead copper, pour order 0): -15,3.033 -15,9.003 -13.97,10.033 -13.97,14.097 -15,15.127 -15,18.401 -14.351,19.05 -14.351,22.098 -15,22.747 -15,43 cw(c-12,43) -12,46 12,46 cw(c12,43) 15,43 15,3.033 cw(c11.967,3.033) 11.967,0 -0.381,0 -0.917,0.536 -8.481,0.536 -9.017,0 -11.967,0 cw(c-11.967,3.033)
no net on Keep-Out Layer "NONET_L-01_P-001" (none, remove dead copper): -15,3 -15,9.003 -13.97,10.033 -13.97,14.097 -15,15.127 -15,18.401 -14.351,19.05 -14.351,22.098 -15,22.747 -15,43 cw(c-12,43) -12,46 12,46 cw(c12,43) 15,43 15,3 cw(c12,3) 12,0 -0.381,0 -0.917,0.536 -8.481,0.536 -9.017,0 -12,0 cw(c-12,3)

## Other copper
Top Layer:
  region net GND: -12.192,32.766 -12.446,32.512 -12.446,31.496 -12.192,31.242 -11.176,31.242 -10.922,31.496 -10.922,32.512 -11.176,32.766
  pour cut-out: -13.335,33.909 -13.589,33.655 -13.589,30.353 -13.335,30.099 -10.033,30.099 -9.779,30.353 -9.779,33.655 -10.033,33.909
  region net 3V3: -7.62,15.621 -6.858,15.621 -6.604,15.367 -6.604,13.716 -6.35,13.462 -5.461,13.462 -4.699,12.7 -4.699,11.176 -4.826,11.049 -5.207,11.049 -5.334,11.176 -5.334,12.446 -5.715,12.827 -8.128,12.827 -8.382,13.081 -8.382,14.224 -7.747,14.859 -7.747,15.494
  region net VUSB: -10.922,10.033 -9.398,10.033 -9.271,9.906 -9.271,9.652 -9.525,9.398 -9.525,8.382 -8.001,6.858 -5.969,6.858 -5.715,6.604 -5.715,4.699 -5.842,4.572 -6.096,4.572 -6.223,4.699 -6.223,6.096 -6.604,6.477 -9.906,6.477 -10.287,6.858 -10.287,9.144 -10.541,9.398 -10.922,9.398 -11.049,9.525 -11.049,9.906
  region net VBAT: -9.271,14.478 -9.398,14.605 -10.922,14.605 -11.049,14.478 -11.049,13.208 -10.668,12.827 -9.525,12.827 -9.271,13.081
  pour cut-out: -13.513,9.398 -12.751,9.398 -12.497,9.144 -12.497,8.128 -12.751,7.874 -13.513,7.874 -13.767,8.128 -13.767,9.144
  pour cut-out: -11.252,9.398 -10.49,9.398 -10.236,9.144 -10.236,8.128 -10.49,7.874 -11.252,7.874 -11.506,8.128 -11.506,9.144
  pour cut-out: -13.513,16.256 -12.751,16.256 -12.497,16.002 -12.497,14.986 -12.751,14.732 -13.513,14.732 -13.767,14.986 -13.767,16.002
  pour cut-out: -11.252,16.256 -10.49,16.256 -10.236,16.002 -10.236,14.986 -10.49,14.732 -11.252,14.732 -11.506,14.986 -11.506,16.002
  region net VIN: -10.541,12.573 -10.922,12.192 -10.922,11.151 -10.668,10.897 -8.865,10.897 -8.382,10.414 -8.382,10.033 -8.255,9.906 -7.62,9.906 -7.493,10.033 -7.493,11.938 -7.239,12.192 -6.731,12.192 -6.477,11.938 -6.477,11.175 -6.351,11.049 -5.715,11.049 -5.588,11.176 -5.588,12.319 -5.842,12.573 -8.382,12.573 -8.636,12.827 -8.636,14.351 -8.001,14.986 -8.001,15.494 -8.128,15.621 -8.763,15.621 -8.89,15.494 -8.89,14.986 -8.89,12.827 -9.144,12.573
Bottom Layer:
  region net GND: -11.303,32.385 -12.065,32.385 -12.065,31.623 -11.303,31.623
  region net GND: 3.683,14.605 1.397,14.605 1.397,12.319 3.683,12.319
  region net VBAT: -9.398,13.97 -9.652,14.224 -10.668,14.224 -10.922,13.97 -10.922,11.43 -11.43,10.922 -11.43,10.287 -11.303,10.16 -9.779,10.16 -9.398,10.541
Multi-Layer:
  pour cut-out: -10.414,24.892 -10.16,25.146 -10.16,28.194 -10.414,28.448 -13.462,28.448 -13.716,28.194 -13.716,25.146 -13.462,24.892
  pour cut-out: -15,35.546 -15,43 cw(c-12,43) -12,46 12,46 cw(c12,43) 15,43 15,35.546 14.605,35.941 -14.605,35.941

## Silkscreen, mask and mechanical layers (free items; w line width, h text height)
Top Overlay:
  circle w0.406: c7.874,6.76 r0.203
  circle w0.254: c-6.096,19.939 r0.762
  circle w0.254: c-6.096,19.939 r0.127
  region: 12.065,18.542 12.573,19.05 12.573,18.034
  region: 12.573,19.812 12.065,19.304 12.065,20.32
  region: 2.794,7.014 3.302,6.506 2.286,6.506
  region: 1.524,6.506 1.016,7.014 2.032,7.014
  region: 14.732,16.51 13.716,16.51 13.716,16.383 cw(c13.716,16.002) 14.097,16.002 cw(c13.716,16.002) 13.716,15.621 13.716,15.494 14.732,15.494 14.859,15.621 14.859,16.383
  lines w0.152: 1.016,7.014 2.032,7.014 1.524,6.506 1.016,7.014 ; 2.286,6.506 3.302,6.506 2.794,7.014 2.286,6.506 ; 12.065,18.542 12.573,19.05 12.573,18.034 12.065,18.542 ; 12.065,19.304 12.573,19.812 12.065,20.32 12.065,19.304
  lines w0.254: -7.62,19.304 -8.255,19.939 ; -7.62,20.574 -8.255,19.939 ; -6.858,19.939 -8.255,19.939 ; -6.731,21.463 -6.096,22.098 ; -6.442,18.325 ccw(c-6.096,19.939) -4.464,19.688 ; -6.096,20.701 -6.096,22.098 ; -5.461,21.463 -6.096,22.098 ; -4.904,19.434 -4.464,19.688 ; -4.21,19.248 -4.464,19.688
  text "UWB-Node" at 9.525,33.655 h2.67 r270
  text "KitSprout" at 11.303,33.655 h3.35 r270
  text "v1.2" at 9.525,22.86 h1.78 r270
  text "X" at -6.731,22.352 h2.54
  text "Y" at -9.525,19.304 h2.54
Bottom Overlay:
  drawing of 3460 lines, arcs and shapes, not listed
  text "A0" at 12.7,34.544 h1.52
  text "A1" at 12.7,33.274 h1.52
  text "A4" at 12.7,32.004 h1.52
  text "A5" at 12.7,30.734 h1.52
  text "A6" at 12.7,29.464 h1.52
  text "A7" at 12.7,28.194 h1.52
  text "B8" at 12.7,26.924 h1.52
  text "B9" at 12.7,25.654 h1.52
  text "B5" at 12.7,24.384 h1.52
  text "B4" at 12.7,23.114 h1.52
  text "B3" at 12.7,21.844 h1.52
  text "A15" at 12.7,20.574 h1.52
  text "A2" at 12.7,19.304 h1.52
  text "A3" at 12.7,18.034 h1.52
  text "GD" at 12.7,16.764 h1.52
  text "3V" at 12.7,15.494 h1.52
  text "+" at -11.43,13.97 h3.05 r180
Mechanical 1:
  lines w0.051: -15,3 ccw(c-12,3) -12,0 -9.017,0 -8.481,0.536 -0.917,0.536 -0.381,0 12,0 ccw(c12,3) 15,3 15,43 ccw(c12,43) 12,46 -12,46 ccw(c-12,43) -15,43 -15,22.747 -14.351,22.098 -14.351,19.05 -15,18.401 -15,15.127 -13.97,14.097 -13.97,10.033 -15,9.003 -15,3
T-Component:
  circle w0.051: c-12,3 r3
  circle w0.051: c12,3 r3
  circle w0.051: c-12,43 r3
  circle w0.051: c12,43 r3

## Dimensions
12,43 to -12,43 on Mechanical 13
12,43 to 12,3 on Mechanical 13
12,46 to 12,0 on Mechanical 13
-15,43 to 15,43 on Mechanical 13